# Altium PCB A1_v31.PcbDoc (part 4 of 6)
Units mil, origin at the board's own origin, x right, y up, seen from the top; angles counter-clockwise.
Board outline 3937.01 x 3149.61 mil, 2 copper layers (Top Layer, Bottom Layer); 94 components, 93 nets, 325 pads, 43 vias.
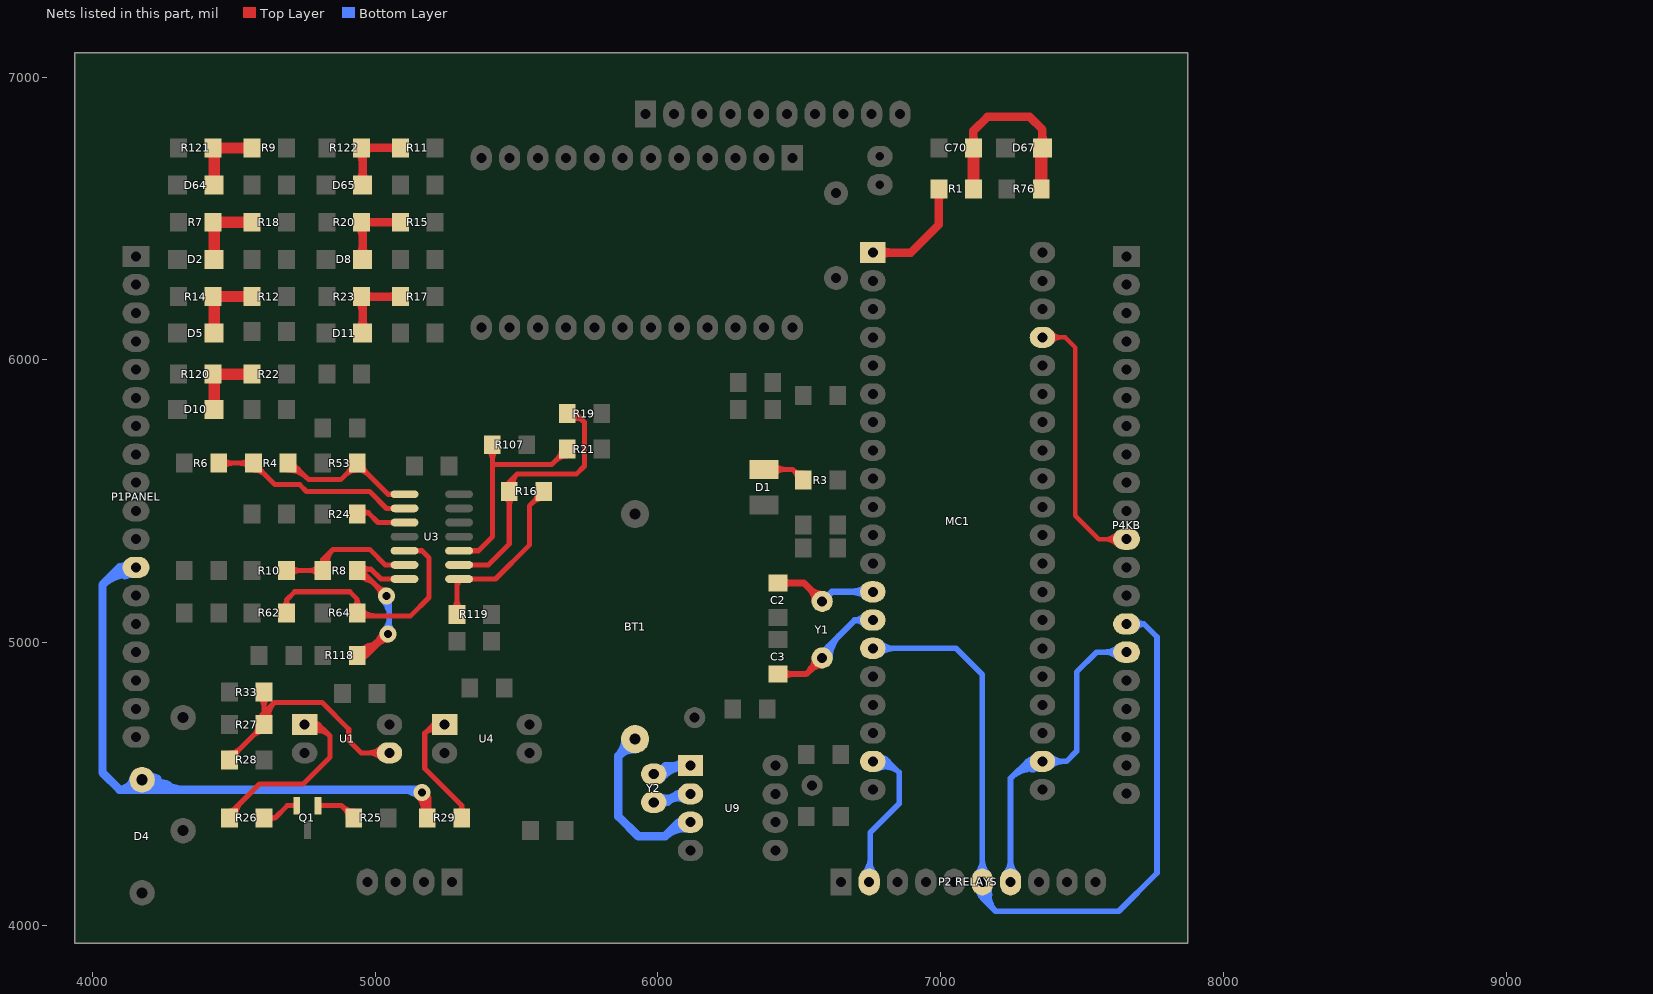
[diagram p4: the nets of this part, all layers, seen from the top]

## Via types
v1: diameter 60, hole 28, Top Layer to Bottom Layer, 30 vias
v2: diameter 90, hole 35.43, Top Layer to Bottom Layer, 6 vias
v3: diameter 75, hole 28, Top Layer to Bottom Layer, 5 vias
v4: diameter 75, hole 35.43, Top Layer to Bottom Layer, 2 vias

## Nets (pads, with @x,y where several pads share a name; then routed paths per layer and width w, separated by ;. In a path a pad name is that pad's centre, name@x,y a point inside that pad or via, vN(x,y) a via of type N, cw(c..) or ccw(c..) an arc to the next point about the centre after c; other vN are vias at no path point) (continued)
MANUAL_R: "P2 RELAYS.6" MC1.15 P4KB.14 | length 4591.4
  Bottom Layer w20: MC1.15@6760,4980 7054,4980 7147.24,4886.76 7147.24,4153.54 7147.24,4097.76 ; P4KB.14@7657.48,5066.14 7718.86,5066.14 ; MC1.15@6786.95,4960.55 cw(c6833.89,4913.61) 6833.89,4980 ; MC1.15@6786.95,4960.55 cw(c6833.89,4913.61) 6833.89,4980 ; MC1.15@6786.95,4960.55 cw(c6833.89,4913.61) 6833.89,4980 ; MC1.15@6786.95,4999.45 ccw(c6833.89,5046.39) 6833.89,4980 ; MC1.15@6786.95,4999.45 ccw(c6833.89,5046.39) 6833.89,4980 ; MC1.15@6786.95,4999.45 ccw(c6833.89,5046.39) 6833.89,4980 ; 7127.8,4182.99 ccw(c7080.85,4229.93) 7147.24,4229.93 ; 7127.8,4182.99 ccw(c7080.85,4229.93) 7147.24,4229.93 ; 7127.8,4182.99 ccw(c7080.85,4229.93) 7147.24,4229.93 ; 7134.33,4119.27 cw(c7122.88,4097.76) 7147.24,4097.76 ; 7134.33,4119.27 cw(c7122.88,4097.76) 7147.24,4097.76 ; 7134.33,4119.27 cw(c7122.88,4097.76) 7147.24,4097.76 ; 7135.28,4147.17 ccw(c7183.24,4132.63) 7147.8,4097.2 ; 7135.28,4147.17 ccw(c7183.24,4132.63) 7147.8,4097.2 ; 7135.28,4147.17 ccw(c7183.24,4132.63) 7147.8,4097.2 ; 7147.24,4097.76 cw(c7171.61,4097.76) 7160.16,4119.27 ; 7147.24,4097.76 cw(c7171.61,4097.76) 7160.16,4119.27 ; 7147.24,4097.76 cw(c7171.61,4097.76) 7160.16,4119.27 ; 7147.24,4097.76 7195,4050 ; 7147.24,4229.93 ccw(c7213.63,4229.93) 7166.69,4182.99 ; 7147.24,4229.93 ccw(c7213.63,4229.93) 7166.69,4182.99 ; 7147.24,4229.93 ccw(c7213.63,4229.93) 7166.69,4182.99 ; 7154.42,4141.37 ccw(c7219.45,4121.65) 7171.4,4073.6 ; 7154.42,4141.37 ccw(c7219.45,4121.65) 7171.4,4073.6 ; 7154.42,4141.37 ccw(c7219.45,4121.65) 7171.4,4073.6 ; 7156.37,4152.09 cw(c7112.2,4110.72) 7172.69,4108.74 ; 7156.37,4152.09 cw(c7112.2,4110.72) 7172.69,4108.74 ; 7156.37,4152.09 cw(c7112.2,4110.72) 7172.69,4108.74 ; 7173.56,4135.56 ccw(c7255.66,4110.67) 7195,4050 ; 7173.56,4135.56 ccw(c7255.66,4110.67) 7195,4050 ; 7173.56,4135.56 ccw(c7255.66,4110.67) 7195,4050 ; 7195,4050 7630,4050 7765,4185 7765,5020 7718.86,5066.14 ; 7718.86,5066.14 cw(c7718.86,5100.38) 7690.36,5081.39 ccw(c7718.86,5100.38) 7718.86,5066.14 ; 7718.86,5066.14 ccw(c7718.86,5031.9) 7690.36,5050.89 cw(c7718.86,5031.9) 7718.86,5066.14
MCONTACT: "P2 RELAYS.7" MC1.22 P4KB.15 | length 3106.8
  Bottom Layer w20: 7247.24,4153.54 7247.24,4520.24 ; P4KB.15@7657.48,4966.14 7551.14,4966.14 7481,4896 7481,4616 7445,4580 MC1.22@7360,4580 7307,4580 ; 7227.8,4182.99 ccw(c7180.85,4229.93) 7247.24,4229.93 ; 7227.8,4182.99 ccw(c7180.85,4229.93) 7247.24,4229.93 ; 7227.8,4182.99 ccw(c7180.85,4229.93) 7247.24,4229.93 ; 7247.24,4229.93 ccw(c7313.63,4229.93) 7266.69,4182.99 ; 7247.24,4229.93 ccw(c7313.63,4229.93) 7266.69,4182.99 ; 7247.24,4229.93 ccw(c7313.63,4229.93) 7266.69,4182.99 ; 7247.25,4520.25 cw(c7329.56,4437.94) MC1.22@7348.12,4552.85 ; 7247.25,4520.25 cw(c7329.56,4437.94) MC1.22@7348.12,4552.85 ; 7247.25,4520.25 cw(c7329.56,4437.94) MC1.22@7348.12,4552.85 ; 7247.24,4520.24 7307,4580 ; 7274.9,4547.9 cw(c7337.25,4485.55) MC1.22@7351.3,4572.6 ; 7274.9,4547.9 cw(c7337.25,4485.55) MC1.22@7351.3,4572.6 ; 7274.9,4547.9 cw(c7337.25,4485.55) MC1.22@7351.3,4572.6 ; 7302.55,4575.55 cw(c7344.94,4533.17) MC1.22@7354.49,4592.34 ; 7302.55,4575.55 cw(c7344.94,4533.17) MC1.22@7354.49,4592.34 ; 7302.55,4575.55 cw(c7344.94,4533.17) MC1.22@7354.49,4592.34 ; 7304.59,4567.83 cw(c7308.81,4526.39) MC1.22@7335.13,4558.68 ; 7304.59,4567.83 cw(c7308.81,4526.39) MC1.22@7335.13,4558.68 ; 7304.59,4567.83 cw(c7308.81,4526.39) MC1.22@7335.13,4558.68 ; 7307,4580 cw(c7307,4556.11) MC1.22@7328.15,4567.22 ; 7307,4580 ccw(c7307,4603.89) MC1.22@7328.15,4592.78 ; 7307,4580 ccw(c7307,4603.89) MC1.22@7328.15,4592.78 ; 7307,4580 cw(c7307,4556.11) MC1.22@7328.15,4567.22 ; 7307,4580 ccw(c7307,4603.89) MC1.22@7328.15,4592.78 ; 7307,4580 cw(c7307,4556.11) MC1.22@7328.15,4567.22 ; 7321.42,4550.13 ccw(c7315.28,4610.33) MC1.22@7362.19,4572.1 ; 7321.42,4550.13 ccw(c7315.28,4610.33) MC1.22@7362.19,4572.1 ; 7321.42,4550.13 ccw(c7315.28,4610.33) MC1.22@7362.19,4572.1 ; MC1.22@7386.95,4560.55 cw(c7433.89,4513.61) 7433.89,4580 ; MC1.22@7386.95,4560.55 cw(c7433.89,4513.61) 7433.89,4580 ; MC1.22@7386.95,4560.55 cw(c7433.89,4513.61) 7433.89,4580 ; MC1.22@7386.95,4599.45 ccw(c7433.89,4646.39) 7433.89,4580 ; MC1.22@7386.95,4599.45 ccw(c7433.89,4646.39) 7433.89,4580 ; MC1.22@7386.95,4599.45 ccw(c7433.89,4646.39) 7433.89,4580 ; 7581.09,4966.14 cw(c7581.09,4899.75) 7628.03,4946.7 ccw(c7581.09,4899.75) 7581.09,4966.14 ; 7581.09,4966.14 ccw(c7581.09,5032.53) 7628.03,4985.59 cw(c7581.09,5032.53) 7581.09,4966.14
MENU: MC1.37 P4KB.11 | length 1415.4
  Top Layer w16: MC1.37@7360,6080 7440,6080 7476,6044 7476,5449 7558.86,5366.14 P4KB.11@7657.48,5366.14 ; MC1.37@7390.98,6062.14 cw(c7427,6034.75) 7427,6080 ; MC1.37@7390.98,6062.14 cw(c7427,6034.75) 7427,6080 ; MC1.37@7390.98,6062.14 cw(c7427,6034.75) 7427,6080 ; MC1.37@7390.98,6097.86 ccw(c7427,6125.25) 7427,6080 ; MC1.37@7390.98,6097.86 ccw(c7427,6125.25) 7427,6080 ; MC1.37@7390.98,6097.86 ccw(c7427,6125.25) 7427,6080 ; 7576.26,5366.14 cw(c7576.26,5294.92) 7626.62,5345.28 ccw(c7576.26,5294.92) 7576.26,5366.14 ; 7576.26,5366.14 ccw(c7576.26,5437.36) 7626.62,5387 cw(c7576.26,5437.36) 7576.26,5366.14
NetBT1_1: BT1.1 U9.3 | length 864
  Bottom Layer w30: BT1.1@5884,4658.42 cw(c5802.06,4657.68) 5860,4599.73 ; BT1.1@5918.69,4623.73 ccw(c5917.95,4541.79) 5860,4599.73 ; BT1.1@5919,4658.73 5860,4599.73 ; 6068.7,4358.7 cw(c6102.7,4324.7) U9.3@6108.39,4372.45 ; U9.3@6104.84,4342.66 ccw(c6093.4,4246.6) 6025,4315 ; U9.3@6115,4365 6075,4365 6025,4315 ; 5860,4599.73 5860,4385 5930,4315 6025,4315
NetC2_2: C2.2 MC1.13 Y1.2 | length 1459.7
  Top Layer w24: C2.2@6425,5211.02 6515.98,5211.02 Y1.2@6581,5146 ; C2.2@6441.33,5198.63 cw(c6471.25,5168.71) 6471.25,5211.02 ; C2.2@6441.33,5198.63 cw(c6471.25,5168.71) 6471.25,5211.02 ; C2.2@6441.33,5198.63 cw(c6471.25,5168.71) 6471.25,5211.02 ; C2.2@6441.33,5223.42 ccw(c6471.25,5253.34) 6471.25,5211.02 ; C2.2@6441.33,5223.42 ccw(c6471.25,5253.34) 6471.25,5211.02 ; C2.2@6441.33,5223.42 ccw(c6471.25,5253.34) 6471.25,5211.02 ; 6537.47,5189.53 cw(c6493.94,5146) Y1.2@6555.5,5146 ; 6537.47,5189.53 ccw(c6581,5233.06) Y1.2@6581,5171.5 ; 6537.47,5189.53 ccw(c6581,5233.06) Y1.2@6581,5171.5 ; 6537.47,5189.53 cw(c6493.94,5146) Y1.2@6555.5,5146 ; 6537.47,5189.53 ccw(c6581,5233.06) Y1.2@6581,5171.5 ; 6537.47,5189.53 cw(c6493.94,5146) Y1.2@6555.5,5146 ; 6546.26,5180.47 ccw(c6590.49,5192.32) Y1.2@6581.3,5147.47 ; 6546.26,5180.47 ccw(c6590.49,5192.32) Y1.2@6581.3,5147.47 ; 6546.26,5180.47 ccw(c6590.49,5192.32) Y1.2@6581.3,5147.47 ; 6546.53,5180.74 cw(c6534.68,5136.51) Y1.2@6579.53,5145.7 ; 6546.53,5180.74 cw(c6534.68,5136.51) Y1.2@6579.53,5145.7 ; 6546.53,5180.74 cw(c6534.68,5136.51) Y1.2@6579.53,5145.7
  Bottom Layer w24: Y1.2@6581,5146 6615,5180 MC1.13@6760,5180 ; 6690.94,5180 cw(c6690.94,5118.44) MC1.13@6734.47,5161.97 ; 6690.94,5180 ccw(c6690.94,5241.56) MC1.13@6734.47,5198.03 ; 6690.94,5180 ccw(c6690.94,5241.56) MC1.13@6734.47,5198.03 ; 6690.94,5180 cw(c6690.94,5118.44) MC1.13@6734.47,5161.97 ; 6690.94,5180 ccw(c6690.94,5241.56) MC1.13@6734.47,5198.03 ; 6690.94,5180 cw(c6690.94,5118.44) MC1.13@6734.47,5161.97
NetC3_2: C3.2 MC1.14 Y1.1 | length 2112
  Top Layer w22: C3.2@6425,4888.98 6523.98,4888.98 Y1.1@6581,4946 ; C3.2@6442.04,4875.88 cw(c6473.67,4844.25) 6473.67,4888.98 ; C3.2@6442.04,4875.88 cw(c6473.67,4844.25) 6473.67,4888.98 ; C3.2@6442.04,4875.88 cw(c6473.67,4844.25) 6473.67,4888.98 ; C3.2@6442.04,4902.08 ccw(c6473.67,4933.71) 6473.67,4888.98 ; C3.2@6442.04,4902.08 ccw(c6473.67,4933.71) 6473.67,4888.98 ; C3.2@6442.04,4902.08 ccw(c6473.67,4933.71) 6473.67,4888.98 ; 6535.76,4900.76 cw(c6581,4855.52) Y1.1@6581,4919.5 ; 6535.76,4900.76 ccw(c6490.52,4946) Y1.1@6554.5,4946 ; 6535.76,4900.76 ccw(c6490.52,4946) Y1.1@6554.5,4946 ; 6535.76,4900.76 cw(c6581,4855.52) Y1.1@6581,4919.5 ; 6535.76,4900.76 ccw(c6490.52,4946) Y1.1@6554.5,4946 ; 6535.76,4900.76 cw(c6581,4855.52) Y1.1@6581,4919.5 ; 6540.58,4908.67 ccw(c6527.65,4956.93) Y1.1@6576.59,4946.9 ; 6540.58,4908.67 ccw(c6527.65,4956.93) Y1.1@6576.59,4946.9 ; 6540.58,4908.67 ccw(c6527.65,4956.93) Y1.1@6576.59,4946.9 ; 6543.67,4905.58 cw(c6591.93,4892.65) Y1.1@6581.9,4941.59 ; 6543.67,4905.58 cw(c6591.93,4892.65) Y1.1@6581.9,4941.59 ; 6543.67,4905.58 cw(c6591.93,4892.65) Y1.1@6581.9,4941.59
  Bottom Layer w22: Y1.1@6581,4946 6581,4965 6696,5080 ; MC1.14@6760,5080 6696,5080 ; Y1.1@6579.2,4950.13 ccw(c6549.17,5019.15) 6621.88,4999.67 ; Y1.1@6579.2,4950.13 ccw(c6549.17,5019.15) 6621.88,4999.67 ; Y1.1@6579.2,4950.13 ccw(c6549.17,5019.15) 6621.88,4999.67 ; Y1.1@6585.5,4946 cw(c6642.23,4946) 6602.12,4986.12 ; Y1.1@6585.5,4946 cw(c6642.23,4946) 6602.12,4986.12 ; Y1.1@6585.5,4946 cw(c6642.23,4946) 6602.12,4986.12 ; Y1.1@6607.5,4946 cw(c6717.35,4946) 6639.67,5023.67 ; Y1.1@6607.5,4946 cw(c6717.35,4946) 6639.67,5023.67 ; Y1.1@6607.5,4946 cw(c6717.35,4946) 6639.67,5023.67 ; 6696,5080 cw(c6696,5033.03) MC1.14@6732.12,5063.06 ; 6696,5080 ccw(c6696,5126.97) MC1.14@6732.12,5096.94 ; 6696,5080 ccw(c6696,5126.97) MC1.14@6732.12,5096.94 ; 6696,5080 cw(c6696,5033.03) MC1.14@6732.12,5063.06 ; 6696,5080 ccw(c6696,5126.97) MC1.14@6732.12,5096.94 ; 6696,5080 cw(c6696,5033.03) MC1.14@6732.12,5063.06
NetC70_1: C70.1 D67.1 R1.2 R76.2 | length 1172.8
  Top Layer w30: C70.1@7116.02,6750 7116.02,6811.02 7165,6860 7315,6860 7359.96,6815.04 D67.1@7359.96,6750 ; C70.1@7105.75,6764.21 ccw(c7080.95,6789.01) 7116.02,6789.01 ; C70.1@7105.75,6764.21 ccw(c7080.95,6789.01) 7116.02,6789.01 ; C70.1@7105.75,6764.21 ccw(c7080.95,6789.01) 7116.02,6789.01 ; 7116.02,6789.01 ccw(c7151.1,6789.01) C70.1@7126.3,6764.21 ; 7116.02,6789.01 ccw(c7151.1,6789.01) C70.1@7126.3,6764.21 ; 7116.02,6789.01 ccw(c7151.1,6789.01) C70.1@7126.3,6764.21 ; D67.1@7346.91,6763.06 ccw(c7315.38,6794.58) 7359.96,6794.58 ; D67.1@7346.91,6763.06 ccw(c7315.38,6794.58) 7359.96,6794.58 ; D67.1@7346.91,6763.06 ccw(c7315.38,6794.58) 7359.96,6794.58 ; 7359.96,6794.58 ccw(c7404.54,6794.58) D67.1@7373.02,6763.06 ; 7359.96,6794.58 ccw(c7404.54,6794.58) D67.1@7373.02,6763.06 ; 7359.96,6794.58 ccw(c7404.54,6794.58) D67.1@7373.02,6763.06
  Top Layer w44: R1.2@7116.02,6605 C70.1@7116.02,6750 ; R76.2@7356.02,6605 7356.02,6746.06 D67.1@7359.96,6750 ; 7356.02,6712.82 cw(c7397.15,6712.82) D67.1@7368.07,6741.89 ; 7356.02,6712.82 cw(c7397.15,6712.82) D67.1@7368.07,6741.89 ; 7356.02,6712.82 cw(c7397.15,6712.82) D67.1@7368.07,6741.89
NetD1_2: D1.2 R3.1 | length 647.9
  Top Layer w18: D1.2@6375,5612.99 6475.98,5612.99 ; R3.1@6513.98,5575 6475.98,5612.99 ; D1.2@6410.02,5595.69 cw(c6451.78,5553.93) 6451.78,5612.99 ; D1.2@6410.02,5595.69 cw(c6451.78,5553.93) 6451.78,5612.99 ; D1.2@6410.02,5595.69 cw(c6451.78,5553.93) 6451.78,5612.99 ; D1.2@6410.02,5630.29 ccw(c6451.78,5672.05) 6451.78,5612.99 ; D1.2@6410.02,5630.29 ccw(c6451.78,5672.05) 6451.78,5612.99 ; D1.2@6410.02,5630.29 ccw(c6451.78,5672.05) 6451.78,5612.99 ; 6475.99,5612.99 ccw(c6509.07,5646.08) R3.1@6512.48,5599.41 ; 6475.99,5612.99 ccw(c6509.07,5646.08) R3.1@6512.48,5599.41 ; 6475.99,5612.99 ccw(c6509.07,5646.08) R3.1@6512.48,5599.41 ; 6481.72,5607.26 cw(c6453.4,5578.94) R3.1@6493.45,5578.94 ; 6481.72,5607.26 cw(c6453.4,5578.94) R3.1@6493.45,5578.94 ; 6481.72,5607.26 cw(c6453.4,5578.94) R3.1@6493.45,5578.94
NetD2_1: D2.1 R7.2 R18.1 | length 356.8
  Top Layer w40: D2.1@4429.96,6355.82 4429.96,6483.28 R7.2@4426.02,6487.21 R18.1@4563.98,6487.21 ; R7.2@4419.29,6476.54 cw(c4393.52,6450.77) 4429.96,6450.77 ; R7.2@4419.29,6476.54 cw(c4393.52,6450.77) 4429.96,6450.77 ; R7.2@4419.29,6476.54 cw(c4393.52,6450.77) 4429.96,6450.77
NetD5_1: D5.1 R12.1 R14.2 | length 354.9
  Top Layer w40: D5.1@4429.96,6095 4429.96,6220.49 R14.2@4426.02,6224.43 R12.1@4563.98,6224.43 ; R14.2@4419.29,6213.75 cw(c4393.52,6187.99) 4429.96,6187.99 ; R14.2@4419.29,6213.75 cw(c4393.52,6187.99) 4429.96,6187.99 ; R14.2@4419.29,6213.75 cw(c4393.52,6187.99) 4429.96,6187.99
NetD8_1: D8.1 R15.1 R20.2 | length 925.9
  Top Layer w30: D8.1@4954.96,6355.82 4954.96,6483.28 R20.2@4951.02,6487.21 R15.1@5088.98,6487.21 ; R20.2@4940.75,6473 cw(c4906.45,6438.7) 4954.96,6438.7 ; R20.2@4940.75,6473 cw(c4906.45,6438.7) 4954.96,6438.7 ; R20.2@4940.75,6473 cw(c4906.45,6438.7) 4954.96,6438.7 ; D8.1@4941.9,6368.87 ccw(c4910.38,6400.4) 4954.96,6400.4 ; D8.1@4941.9,6368.87 ccw(c4910.38,6400.4) 4954.96,6400.4 ; D8.1@4941.9,6368.87 ccw(c4910.38,6400.4) 4954.96,6400.4 ; 4954.96,6400.4 ccw(c4999.54,6400.4) D8.1@4968.02,6368.87 ; 4954.96,6400.4 ccw(c4999.54,6400.4) D8.1@4968.02,6368.87 ; 4954.96,6400.4 ccw(c4999.54,6400.4) D8.1@4968.02,6368.87 ; R20.2@4961.3,6476.94 cw(c4986.1,6452.14) 4986.1,6487.21 ; R20.2@4961.3,6476.94 cw(c4986.1,6452.14) 4986.1,6487.21 ; R20.2@4961.3,6476.94 cw(c4986.1,6452.14) 4986.1,6487.21 ; R20.2@4961.3,6497.48 ccw(c4986.1,6522.28) 4986.1,6487.21 ; R20.2@4961.3,6497.48 ccw(c4986.1,6522.28) 4986.1,6487.21 ; R20.2@4961.3,6497.48 ccw(c4986.1,6522.28) 4986.1,6487.21 ; 5053.9,6487.21 cw(c5053.9,6452.14) R15.1@5078.7,6476.94 ; 5053.9,6487.21 ccw(c5053.9,6522.28) R15.1@5078.7,6497.48 ; 5053.9,6487.21 ccw(c5053.9,6522.28) R15.1@5078.7,6497.48 ; 5053.9,6487.21 cw(c5053.9,6452.14) R15.1@5078.7,6476.94 ; 5053.9,6487.21 ccw(c5053.9,6522.28) R15.1@5078.7,6497.48 ; 5053.9,6487.21 cw(c5053.9,6452.14) R15.1@5078.7,6476.94
NetD10_1: D10.1 R22.1 R120.1 | length 350.4
  Top Layer w40: D10.1@4429.96,5825 4429.96,5946.06 R120.1@4426.02,5950 R22.1@4563.98,5950 ; R120.1@4419.29,5939.33 cw(c4393.52,5913.56) 4429.96,5913.56 ; R120.1@4419.29,5939.33 cw(c4393.52,5913.56) 4429.96,5913.56 ; R120.1@4419.29,5939.33 cw(c4393.52,5913.56) 4429.96,5913.56
NetD11_1: D11.1 R17.1 R23.2 | length 923.9
  Top Layer w30: D11.1@4954.96,6095 4954.96,6220.49 R23.2@4951.02,6224.43 R17.1@5088.98,6224.43 ; R23.2@4940.75,6210.22 cw(c4906.45,6175.91) 4954.96,6175.91 ; R23.2@4940.75,6210.22 cw(c4906.45,6175.91) 4954.96,6175.91 ; R23.2@4940.75,6210.22 cw(c4906.45,6175.91) 4954.96,6175.91 ; D11.1@4941.9,6108.06 ccw(c4910.38,6139.58) 4954.96,6139.58 ; D11.1@4941.9,6108.06 ccw(c4910.38,6139.58) 4954.96,6139.58 ; D11.1@4941.9,6108.06 ccw(c4910.38,6139.58) 4954.96,6139.58 ; 4954.96,6139.58 ccw(c4999.54,6139.58) D11.1@4968.02,6108.06 ; 4954.96,6139.58 ccw(c4999.54,6139.58) D11.1@4968.02,6108.06 ; 4954.96,6139.58 ccw(c4999.54,6139.58) D11.1@4968.02,6108.06 ; R23.2@4961.3,6214.15 cw(c4986.1,6189.35) 4986.1,6224.43 ; R23.2@4961.3,6214.15 cw(c4986.1,6189.35) 4986.1,6224.43 ; R23.2@4961.3,6214.15 cw(c4986.1,6189.35) 4986.1,6224.43 ; R23.2@4961.3,6234.7 ccw(c4986.1,6259.5) 4986.1,6224.43 ; R23.2@4961.3,6234.7 ccw(c4986.1,6259.5) 4986.1,6224.43 ; R23.2@4961.3,6234.7 ccw(c4986.1,6259.5) 4986.1,6224.43 ; 5053.9,6224.43 cw(c5053.9,6189.35) R17.1@5078.7,6214.15 ; 5053.9,6224.43 ccw(c5053.9,6259.5) R17.1@5078.7,6234.7 ; 5053.9,6224.43 ccw(c5053.9,6259.5) R17.1@5078.7,6234.7 ; 5053.9,6224.43 cw(c5053.9,6189.35) R17.1@5078.7,6214.15 ; 5053.9,6224.43 ccw(c5053.9,6259.5) R17.1@5078.7,6234.7 ; 5053.9,6224.43 cw(c5053.9,6189.35) R17.1@5078.7,6214.15
NetD64_1: D64.1 R9.1 R121.1 | length 356.8
  Top Layer w40: D64.1@4429.96,6618.61 4429.96,6746.06 R121.1@4426.02,6750 R9.1@4563.98,6750 ; R121.1@4419.29,6739.33 cw(c4393.52,6713.56) 4429.96,6713.56 ; R121.1@4419.29,6739.33 cw(c4393.52,6713.56) 4429.96,6713.56 ; R121.1@4419.29,6739.33 cw(c4393.52,6713.56) 4429.96,6713.56
NetD65_1: D65.1 R11.1 R122.1 | length 925.9
  Top Layer w30: D65.1@4954.96,6618.61 4954.96,6746.06 R122.1@4951.02,6750 R11.1@5088.98,6750 ; R122.1@4940.75,6735.79 cw(c4906.45,6701.49) 4954.96,6701.49 ; R122.1@4940.75,6735.79 cw(c4906.45,6701.49) 4954.96,6701.49 ; R122.1@4940.75,6735.79 cw(c4906.45,6701.49) 4954.96,6701.49 ; D65.1@4941.9,6631.66 ccw(c4910.38,6663.18) 4954.96,6663.18 ; D65.1@4941.9,6631.66 ccw(c4910.38,6663.18) 4954.96,6663.18 ; D65.1@4941.9,6631.66 ccw(c4910.38,6663.18) 4954.96,6663.18 ; 4954.96,6663.18 ccw(c4999.54,6663.18) D65.1@4968.02,6631.66 ; 4954.96,6663.18 ccw(c4999.54,6663.18) D65.1@4968.02,6631.66 ; 4954.96,6663.18 ccw(c4999.54,6663.18) D65.1@4968.02,6631.66 ; R122.1@4961.3,6739.73 cw(c4986.1,6714.93) 4986.1,6750 ; R122.1@4961.3,6739.73 cw(c4986.1,6714.93) 4986.1,6750 ; R122.1@4961.3,6739.73 cw(c4986.1,6714.93) 4986.1,6750 ; R122.1@4961.3,6760.27 ccw(c4986.1,6785.07) 4986.1,6750 ; R122.1@4961.3,6760.27 ccw(c4986.1,6785.07) 4986.1,6750 ; R122.1@4961.3,6760.27 ccw(c4986.1,6785.07) 4986.1,6750 ; 5053.9,6750 cw(c5053.9,6714.93) R11.1@5078.7,6739.73 ; 5053.9,6750 ccw(c5053.9,6785.07) R11.1@5078.7,6760.27 ; 5053.9,6750 ccw(c5053.9,6785.07) R11.1@5078.7,6760.27 ; 5053.9,6750 cw(c5053.9,6714.93) R11.1@5078.7,6739.73 ; 5053.9,6750 ccw(c5053.9,6785.07) R11.1@5078.7,6760.27 ; 5053.9,6750 cw(c5053.9,6714.93) R11.1@5078.7,6739.73
NetMC1_1: MC1.1 R1.1 | length 822.2
  Top Layer w30: MC1.1@6760,6380 6895,6380 6993.98,6478.98 R1.1@6993.98,6605 ; MC1.1@6783.41,6364.09 cw(c6821.82,6325.68) 6821.82,6380 ; MC1.1@6783.41,6364.09 cw(c6821.82,6325.68) 6821.82,6380 ; MC1.1@6783.41,6364.09 cw(c6821.82,6325.68) 6821.82,6380 ; MC1.1@6783.41,6395.91 ccw(c6821.82,6434.32) 6821.82,6380 ; MC1.1@6783.41,6395.91 ccw(c6821.82,6434.32) 6821.82,6380 ; MC1.1@6783.41,6395.91 ccw(c6821.82,6434.32) 6821.82,6380 ; R1.1@6983.7,6590.79 cw(c6958.9,6565.99) 6993.98,6565.99 ; R1.1@6983.7,6590.79 cw(c6958.9,6565.99) 6993.98,6565.99 ; R1.1@6983.7,6590.79 cw(c6958.9,6565.99) 6993.98,6565.99 ; 6993.98,6565.99 cw(c7029.05,6565.99) R1.1@7004.25,6590.79 ; 6993.98,6565.99 cw(c7029.05,6565.99) R1.1@7004.25,6590.79 ; 6993.98,6565.99 cw(c7029.05,6565.99) R1.1@7004.25,6590.79
NetQ1_1: Q1.1 R25.2 | length 511
  Top Layer w18: Q1.1@4797.4,4423.31 4880.67,4423.31 R25.2@4923.98,4380 ; 4882.21,4421.76 ccw(c4923.98,4463.53) R25.2@4923.98,4404.46 ; 4882.21,4421.76 ccw(c4923.98,4463.53) R25.2@4923.98,4404.46 ; 4882.21,4421.76 ccw(c4923.98,4463.53) R25.2@4923.98,4404.46 ; 4891.53,4413.16 cw(c4880.53,4372.11) R25.2@4921.54,4383.27 ; 4891.53,4413.16 cw(c4880.53,4372.11) R25.2@4921.54,4383.27 ; 4891.53,4413.16 cw(c4880.53,4372.11) R25.2@4921.54,4383.27 ; 4891.72,4412.26 cw(c4863.4,4383.94) R25.2@4903.45,4383.94 ; 4891.72,4412.26 cw(c4863.4,4383.94) R25.2@4903.45,4383.94 ; 4891.72,4412.26 cw(c4863.4,4383.94) R25.2@4903.45,4383.94
NetQ1_2: Q1.2 R26.1 | length 290
  Top Layer w18: R26.1@4606.02,4380 4645,4380 ; Q1.2@4722.6,4423.31 4688.31,4423.31 4645,4380 ; R26.1@4622.95,4368.39 cw(c4645,4353.26) 4645,4380 ; R26.1@4622.95,4368.39 cw(c4645,4353.26) 4645,4380 ; R26.1@4622.95,4368.39 cw(c4645,4353.26) 4645,4380 ; R26.1@4622.95,4391.61 ccw(c4645,4406.74) 4645,4380 ; R26.1@4622.95,4391.61 ccw(c4645,4406.74) 4645,4380 ; R26.1@4622.95,4391.61 ccw(c4645,4406.74) 4645,4380
NetR4_1: R4.1 R53.2 U3.1 | length 1222.6
  Top Layer w18: R4.1@4691.02,5610.54 cw(c4691.02,5515.32) 4758.35,5582.65 ; R4.1@4691.02,5628.54 cw(c4691.02,5576.77) 4727.63,5613.37 ; R4.1@4691.02,5635 4706,5635 4764.46,5576.54 4877.56,5576.54 R53.2@4936.02,5635 4936.02,5633.98 5045,5525 U3.1@5103.54,5525 ; 4894.26,5593.24 cw(c4936.02,5551.47) R53.2@4936.02,5610.54 ; 4894.26,5593.24 cw(c4936.02,5551.47) R53.2@4936.02,5610.54 ; 4894.26,5593.24 cw(c4936.02,5551.47) R53.2@4936.02,5610.54 ; 4903.58,5601.84 ccw(c4892.58,5642.89) R53.2@4933.59,5631.73 ; 4903.58,5601.84 ccw(c4892.58,5642.89) R53.2@4933.59,5631.73 ; 4903.58,5601.84 ccw(c4892.58,5642.89) R53.2@4933.59,5631.73 ; 4903.77,5602.74 ccw(c4875.44,5631.06) R53.2@4915.5,5631.06 ; 4903.77,5602.74 ccw(c4875.44,5631.06) R53.2@4915.5,5631.06 ; 4903.77,5602.74 ccw(c4875.44,5631.06) R53.2@4915.5,5631.06 ; R53.2@4936.02,5610.54 cw(c4936.02,5553.95) 4976.04,5593.96 ; R53.2@4936.02,5610.54 cw(c4936.02,5553.95) 4976.04,5593.96 ; R53.2@4936.02,5610.54 cw(c4936.02,5553.95) 4976.04,5593.96 ; R53.2@4956.55,5631.06 ccw(c4999.08,5631.06) 4969.01,5600.99 ; R53.2@4956.55,5631.06 ccw(c4999.08,5631.06) 4969.01,5600.99 ; R53.2@4956.55,5631.06 ccw(c4999.08,5631.06) 4969.01,5600.99
NetR4_2: R4.2 R6.1 U3.2 | length 1557.4
  Top Layer w18: R6.1@4446.02,5635 R4.2@4568.98,5635 4644.98,5559 4733.08,5559 4757.08,5535 4980,5535 5040,5475 U3.2@5103.54,5475 ; R6.1@4460.54,5620.48 cw(c4495.58,5585.44) 4495.58,5635 ; R6.1@4460.54,5620.48 cw(c4495.58,5585.44) 4495.58,5635 ; R6.1@4460.54,5620.48 cw(c4495.58,5585.44) 4495.58,5635 ; R6.1@4460.54,5649.52 ccw(c4495.58,5684.56) 4495.58,5635 ; R6.1@4460.54,5649.52 ccw(c4495.58,5684.56) 4495.58,5635 ; R6.1@4460.54,5649.52 ccw(c4495.58,5684.56) 4495.58,5635 ; 4519.42,5635 cw(c4519.42,5585.44) R4.2@4554.46,5620.48 ; 4519.42,5635 ccw(c4519.42,5684.56) R4.2@4554.46,5649.52 ; 4519.42,5635 ccw(c4519.42,5684.56) R4.2@4554.46,5649.52 ; 4519.42,5635 cw(c4519.42,5585.44) R4.2@4554.46,5620.48 ; 4519.42,5635 ccw(c4519.42,5684.56) R4.2@4554.46,5649.52 ; 4519.42,5635 cw(c4519.42,5585.44) R4.2@4554.46,5620.48 ; R4.2@4568.98,5610.54 cw(c4568.98,5551.47) 4610.74,5593.24 ; R4.2@4568.98,5610.54 cw(c4568.98,5551.47) 4610.74,5593.24 ; R4.2@4568.98,5610.54 cw(c4568.98,5551.47) 4610.74,5593.24 ; R4.2@4571.41,5631.73 ccw(c4612.42,5642.89) 4601.42,5601.84 ; R4.2@4571.41,5631.73 ccw(c4612.42,5642.89) 4601.42,5601.84 ; R4.2@4571.41,5631.73 ccw(c4612.42,5642.89) 4601.42,5601.84 ; R4.2@4589.5,5631.06 ccw(c4629.56,5631.06) 4601.23,5602.74 ; R4.2@4589.5,5631.06 ccw(c4629.56,5631.06) 4601.23,5602.74 ; R4.2@4589.5,5631.06 ccw(c4629.56,5631.06) 4601.23,5602.74
NetR8_1: R8.1 R10.2 U3.6 | length 1457.1
  Top Layer w18: R10.2@4686.02,5255 R8.1@4813.98,5255 4813.98,5293.98 4850,5330 ; U3.6@5103.54,5275 5035,5275 4980,5330 4850,5330 ; R10.2@4700.54,5240.48 cw(c4735.58,5205.44) 4735.58,5255 ; R10.2@4700.54,5240.48 cw(c4735.58,5205.44) 4735.58,5255 ; R10.2@4700.54,5240.48 cw(c4735.58,5205.44) 4735.58,5255 ; R10.2@4700.54,5269.52 ccw(c4735.58,5304.56) 4735.58,5255 ; R10.2@4700.54,5269.52 ccw(c4735.58,5304.56) 4735.58,5255 ; R10.2@4700.54,5269.52 ccw(c4735.58,5304.56) 4735.58,5255 ; 4764.42,5255 cw(c4764.42,5205.44) R8.1@4799.46,5240.48 ; 4764.42,5255 ccw(c4764.42,5304.56) R8.1@4799.46,5269.52 ; 4764.42,5255 ccw(c4764.42,5304.56) R8.1@4799.46,5269.52 ; 4764.42,5255 cw(c4764.42,5205.44) R8.1@4799.46,5240.48 ; 4764.42,5255 ccw(c4764.42,5304.56) R8.1@4799.46,5269.52 ; 4764.42,5255 cw(c4764.42,5205.44) R8.1@4799.46,5240.48 ; R8.1@4803.94,5276.84 ccw(c4794.34,5293.97) 4813.98,5293.97 ; R8.1@4803.94,5276.84 ccw(c4794.34,5293.97) 4813.98,5293.97 ; R8.1@4803.94,5276.84 ccw(c4794.34,5293.97) 4813.98,5293.97 ; 4813.98,5293.97 ccw(c4833.61,5293.97) R8.1@4824.01,5276.84 ; 4813.98,5293.97 ccw(c4833.61,5293.97) R8.1@4824.01,5276.84 ; 4813.98,5293.97 ccw(c4833.61,5293.97) R8.1@4824.01,5276.84 ; R8.1@4816.4,5259.67 cw(c4863.56,5273.89) 4828.73,5308.73 ; R8.1@4816.4,5259.67 cw(c4863.56,5273.89) 4828.73,5308.73 ; R8.1@4816.4,5259.67 cw(c4863.56,5273.89) 4828.73,5308.73 ; R8.1@4833.63,5264.86 cw(c4896.24,5283.75) 4850,5330 ; R8.1@4833.63,5264.86 cw(c4896.24,5283.75) 4850,5330 ; R8.1@4833.63,5264.86 cw(c4896.24,5283.75) 4850,5330
NetR8_2: R8.2 R118.1 U3.7 | length 4689.4
  Top Layer w18: R118.1@4936.02,4955 4970,4955 ; v1(5040,5165) 4950,5255 R8.2@4936.02,5255 4941.02,5260 4985,5260 ; v1(5045,5030) 4970,4955 ; U3.7@5103.54,5225 5020,5225 4985,5260 ; R118.1@4936.02,4943.46 ccw(c4936.02,4997.64) 4974.33,4959.33 ; R118.1@4936.02,4943.46 ccw(c4936.02,4997.64) 4974.33,4959.33 ; R118.1@4936.02,4943.46 ccw(c4936.02,4997.64) 4974.33,4959.33 ; R118.1@4936.02,4961.46 ccw(c4936.02,5059.1) 5005.06,4990.06 ; R118.1@4936.02,4961.46 ccw(c4936.02,5059.1) 5005.06,4990.06 ; R118.1@4936.02,4961.46 ccw(c4936.02,5059.1) 5005.06,4990.06 ; R118.1@4936.02,4979.46 ccw(c4936.02,5120.55) v1@5035.79,5020.79 ; R118.1@4936.02,4979.46 ccw(c4936.02,5120.55) v1@5035.79,5020.79 ; R118.1@4936.02,4979.46 ccw(c4936.02,5120.55) v1@5035.79,5020.79 ; R8.2@4936.02,5230.54 cw(c4936.02,5137.73) 5001.65,5203.35 ; R8.2@4936.02,5230.54 cw(c4936.02,5137.73) 5001.65,5203.35 ; R8.2@4936.02,5230.54 cw(c4936.02,5137.73) 5001.65,5203.35 ; R8.2@4936.02,5248.54 cw(c4936.02,5199.19) 4970.92,5234.08 ; R8.2@4936.02,5248.54 cw(c4936.02,5199.19) 4970.92,5234.08 ; R8.2@4936.02,5248.54 cw(c4936.02,5199.19) 4970.92,5234.08 ; R118.1@4938.21,4957.67 cw(c5002.12,4920.77) 4983.02,4992.06 ; R118.1@4938.21,4957.67 cw(c5002.12,4920.77) 4983.02,4992.06 ; R118.1@4938.21,4957.67 cw(c5002.12,4920.77) 4983.02,4992.06 ; R8.2@4938.3,5252.15 ccw(c4993.71,5278.67) 4977.81,5219.34 ; R8.2@4938.3,5252.15 ccw(c4993.71,5278.67) 4977.81,5219.34 ; R8.2@4938.3,5252.15 ccw(c4993.71,5278.67) 4977.81,5219.34 ; R118.1@4946.29,4976.71 ccw(c4966.9,5012.41) 4977.57,4972.6 ; R118.1@4946.29,4976.71 ccw(c4966.9,5012.41) 4977.57,4972.6 ; R118.1@4946.29,4976.71 ccw(c4966.9,5012.41) 4977.57,4972.6 ; R8.2@4950.54,5273.45 ccw(c4983.02,5305.93) 4983.02,5260 ; R8.2@4950.54,5273.45 ccw(c4983.02,5305.93) 4983.02,5260 ; R8.2@4950.54,5273.45 ccw(c4983.02,5305.93) 4983.02,5260 ; R8.2@4951.18,5245.09 cw(c4985,5214.19) 4985,5260 ; R8.2@4951.18,5245.09 cw(c4985,5214.19) 4985,5260 ; R8.2@4951.18,5245.09 cw(c4985,5214.19) 4985,5260 ; R118.1@4953.81,4948.68 cw(c5003.88,4919.8) 4988.92,4975.64 ; R118.1@4953.81,4948.68 cw(c5003.88,4919.8) 4988.92,4975.64 ; R118.1@4953.81,4948.68 cw(c5003.88,4919.8) 4988.92,4975.64 ; R118.1@4954.2,4945.45 cw(c4970,4937.15) 4970,4955 ; R118.1@4954.2,4945.45 cw(c4970,4937.15) 4970,4955 ; R118.1@4954.2,4945.45 cw(c4970,4937.15) 4970,4955 ; R118.1@4954.2,4964.55 ccw(c4970,4972.85) 4970,4955 ; R118.1@4954.2,4964.55 ccw(c4970,4972.85) 4970,4955 ; R118.1@4954.2,4964.55 ccw(c4970,4972.85) 4970,4955 ; 4995.73,4997.66 ccw(c4964.63,5051.54) v1@5024.72,5035.44 ; 4995.73,4997.66 ccw(c4964.63,5051.54) v1@5024.72,5035.44 ; 4995.73,4997.66 ccw(c4964.63,5051.54) v1@5024.72,5035.44 ; 4995.73,4997.66 ccw(c4964.63,5051.54) v1@5024.72,5035.44 ; 4995.73,4997.66 ccw(c4964.63,5051.54) v1@5024.72,5035.44 ; 4995.73,4997.66 ccw(c4964.63,5051.54) v1@5024.72,5035.44 ; 5004.15,5200.85 cw(c4968.3,5165) v1@5019,5165 ; 5004.15,5200.85 ccw(c5040,5236.7) v1@5040,5186 ; 5004.15,5200.85 ccw(c5040,5236.7) v1@5040,5186 ; 5004.15,5200.85 cw(c4968.3,5165) v1@5019,5165 ; 5004.15,5200.85 ccw(c5040,5236.7) v1@5040,5186 ; 5004.15,5200.85 cw(c4968.3,5165) v1@5019,5165 ; 5008.85,5194.35 cw(c4998.73,5156.55) v1@5037.06,5164.4 ; 5008.85,5194.35 cw(c4998.73,5156.55) v1@5037.06,5164.4 ; 5008.85,5194.35 cw(c4998.73,5156.55) v1@5037.06,5164.4 ; 5009.15,4994.15 cw(c5045,4958.3) v1@5045,5009 ; 5009.15,4994.15 ccw(c4973.3,5030) v1@5024,5030 ; 5009.15,4994.15 ccw(c4973.3,5030) v1@5024,5030 ; 5009.15,4994.15 cw(c5045,4958.3) v1@5045,5009 ; 5009.15,4994.15 ccw(c4973.3,5030) v1@5024,5030 ; 5009.15,4994.15 cw(c5045,4958.3) v1@5045,5009 ; 5009.83,5005.8 cw(c5029.42,4971.86) v1@5039.56,5009.72 ; 5009.83,5005.8 cw(c5029.42,4971.86) v1@5039.56,5009.72 ; 5009.83,5005.8 cw(c5029.42,4971.86) v1@5039.56,5009.72 ; 5009.83,5005.8 cw(c5029.42,4971.86) v1@5039.56,5009.72 ; 5009.83,5005.8 cw(c5029.42,4971.86) v1@5039.56,5009.72 ; 5009.83,5005.8 cw(c5029.42,4971.86) v1@5039.56,5009.72 ; 5010.65,5196.15 ccw(c5048.45,5206.27) v1@5040.6,5167.94 ; 5010.65,5196.15 ccw(c5048.45,5206.27) v1@5040.6,5167.94 ; 5010.65,5196.15 ccw(c5048.45,5206.27) v1@5040.6,5167.94 ; 5013.52,5016.04 cw(c5035.41,5003.4) v1@5043.98,5027.18 ; 5013.52,5016.04 cw(c5035.41,5003.4) v1@5043.98,5027.18 ; 5013.52,5016.04 cw(c5035.41,5003.4) v1@5043.98,5027.18 ; 5013.52,5016.04 cw(c5035.41,5003.4) v1@5043.98,5027.18 ; 5013.85,5000.65 ccw(c5003.73,5038.45) v1@5042.06,5030.6 ; 5013.85,5000.65 ccw(c5003.73,5038.45) v1@5042.06,5030.6 ; 5013.85,5000.65 ccw(c5003.73,5038.45) v1@5042.06,5030.6 ; 5015.65,4998.85 cw(c5053.45,4988.73) v1@5045.6,5027.06 ; 5015.65,4998.85 cw(c5053.45,4988.73) v1@5045.6,5027.06 ; 5015.65,4998.85 cw(c5053.45,4988.73) v1@5045.6,5027.06
  Bottom Layer w18: v1(5040,5165) 5050,5155 5050,5035 v1(5045,5030) ; v1@5025.15,5150.15 cw(c4965.16,5090.16) 5050,5090.16 ; v1@5025.15,5150.15 cw(c4965.16,5090.16) 5050,5090.16 ; v1@5025.15,5150.15 cw(c4965.16,5090.16) 5050,5090.16 ; v1@5030.15,5044.85 ccw(c4982.23,5092.77) 5050,5092.77 ; v1@5030.15,5044.85 ccw(c4982.23,5092.77) 5050,5092.77 ; v1@5030.15,5044.85 ccw(c4982.23,5092.77) 5050,5092.77 ; v1@5037.88,5162.88 cw(c5008.62,5133.62) 5050,5133.62 ; v1@5037.88,5162.88 cw(c5008.62,5133.62) 5050,5133.62 ; v1@5037.88,5162.88 cw(c5008.62,5133.62) 5050,5133.62 ; 5050,5068.63 ccw(c5083.63,5068.63) v1@5059.85,5044.85 ; 5050,5068.63 ccw(c5083.63,5068.63) v1@5059.85,5044.85 ; 5050,5068.63 ccw(c5083.63,5068.63) v1@5059.85,5044.85
NetR16_1: R16.1 R19.2 U3.9 | length 1941.2
  Top Layer w18: U3.9@5296.46,5275 5400,5275 5473.98,5348.98 R16.1@5473.98,5535 5473.98,5568.98 ; R19.2@5678.98,5810 5710,5810 ; R16.1@5459.46,5516.55 cw(c5424.42,5481.51) 5473.98,5481.51 ; R16.1@5459.46,5516.55 cw(c5424.42,5481.51) 5473.98,5481.51 ; R16.1@5459.46,5516.55 cw(c5424.42,5481.51) 5473.98,5481.51 ; R16.1@5466.52,5558.06 ccw(c5462.26,5568.98) 5473.98,5568.98 ; R16.1@5466.52,5558.06 ccw(c5462.26,5568.98) 5473.98,5568.98 ; R16.1@5466.52,5558.06 ccw(c5462.26,5568.98) 5473.98,5568.98 ; 5473.98,5481.51 cw(c5523.53,5481.51) R16.1@5488.49,5516.55 ; 5473.98,5481.51 cw(c5523.53,5481.51) R16.1@5488.49,5516.55 ; 5473.98,5481.51 cw(c5523.53,5481.51) R16.1@5488.49,5516.55 ; 5473.98,5568.98 ccw(c5485.69,5568.98) R16.1@5481.43,5558.06 ; 5473.98,5568.98 ccw(c5485.69,5568.98) R16.1@5481.43,5558.06 ; 5473.98,5568.98 ccw(c5485.69,5568.98) R16.1@5481.43,5558.06 ; 5473.98,5568.98 5501,5596 ; R16.1@5476.26,5540.01 cw(c5506.52,5554.24) 5482.88,5577.88 ; R16.1@5476.26,5540.01 cw(c5506.52,5554.24) 5482.88,5577.88 ; R16.1@5476.26,5540.01 cw(c5506.52,5554.24) 5482.88,5577.88 ; R16.1@5492.55,5547.67 cw(c5531.17,5565.82) 5501,5596 ; R16.1@5492.55,5547.67 cw(c5531.17,5565.82) 5501,5596 ; R16.1@5492.55,5547.67 cw(c5531.17,5565.82) 5501,5596 ; 5501,5596 5711,5596 5740,5625 5740,5780 ; R19.2@5680.15,5803.82 cw(c5696.99,5771.63) 5722.68,5797.32 ; R19.2@5680.15,5803.82 cw(c5696.99,5771.63) 5722.68,5797.32 ; R19.2@5680.15,5803.82 cw(c5696.99,5771.63) 5722.68,5797.32 ; R19.2@5688.49,5787.87 cw(c5708.89,5748.89) 5740,5780 ; R19.2@5688.49,5787.87 cw(c5708.89,5748.89) 5740,5780 ; R19.2@5688.49,5787.87 cw(c5708.89,5748.89) 5740,5780 ; R19.2@5697.87,5801.97 cw(c5710,5796.82) 5710,5810 ; R19.2@5697.87,5801.97 cw(c5710,5796.82) 5710,5810 ; R19.2@5697.87,5801.97 cw(c5710,5796.82) 5710,5810 ; R19.2@5697.87,5818.03 ccw(c5710,5823.18) 5710,5810 ; R19.2@5697.87,5818.03 ccw(c5710,5823.18) 5710,5810 ; R19.2@5697.87,5818.03 ccw(c5710,5823.18) 5710,5810 ; 5710,5810 5740,5780
NetR16_2: R16.2 R119.1 U3.8 | length 1373.7
  Top Layer w18: R119.1@5288.98,5100 5288.98,5217.52 U3.8@5296.46,5225 5425,5225 5545,5345 5545,5483.98 R16.2@5596.02,5535 ; R119.1@5274.46,5118.45 ccw(c5239.42,5153.49) 5288.98,5153.49 ; R119.1@5274.46,5118.45 ccw(c5239.42,5153.49) 5288.98,5153.49 ; R119.1@5274.46,5118.45 ccw(c5239.42,5153.49) 5288.98,5153.49 ; 5288.98,5153.49 ccw(c5338.53,5153.49) R119.1@5303.49,5118.45 ; 5288.98,5153.49 ccw(c5338.53,5153.49) R119.1@5303.49,5118.45 ; 5288.98,5153.49 ccw(c5338.53,5153.49) R119.1@5303.49,5118.45 ; 5288.98,5195.4 cw(c5326.05,5195.4) U3.8@5299.84,5221.62 ; 5288.98,5195.4 cw(c5326.05,5195.4) U3.8@5299.84,5221.62 ; 5288.98,5195.4 cw(c5326.05,5195.4) U3.8@5299.84,5221.62 ; 5291.57,5207.31 ccw(c5277.1,5215.66) U3.8@5292.15,5222.92 ; 5291.57,5207.31 ccw(c5277.1,5215.66) U3.8@5292.15,5222.92 ; 5291.57,5207.31 ccw(c5277.1,5215.66) U3.8@5292.15,5222.92 ; 5554.26,5493.24 cw(c5596.02,5451.47) R16.2@5596.02,5510.54 ; 5554.26,5493.24 cw(c5596.02,5451.47) R16.2@5596.02,5510.54 ; 5554.26,5493.24 cw(c5596.02,5451.47) R16.2@5596.02,5510.54 ; 5563.58,5501.84 ccw(c5552.58,5542.89) R16.2@5593.59,5531.73 ; 5563.58,5501.84 ccw(c5552.58,5542.89) R16.2@5593.59,5531.73 ; 5563.58,5501.84 ccw(c5552.58,5542.89) R16.2@5593.59,5531.73 ; 5563.77,5502.74 ccw(c5535.44,5531.06) R16.2@5575.5,5531.06 ; 5563.77,5502.74 ccw(c5535.44,5531.06) R16.2@5575.5,5531.06 ; 5563.77,5502.74 ccw(c5535.44,5531.06) R16.2@5575.5,5531.06
NetR21_1: R21.1 R107.1 U3.10 | length 1351.5
  Top Layer w18: U3.10@5296.46,5325 5365,5325 5415,5375 5415,5630 ; R107.1@5413.98,5700 5415,5698.98 5415,5630 ; R21.1@5678.98,5685 5623.98,5630 5415,5630 ; R107.1@5399.46,5681.55 cw(c5361.95,5644.03) 5415,5644.03 ; R107.1@5399.46,5681.55 cw(c5361.95,5644.03) 5415,5644.03 ; R107.1@5399.46,5681.55 cw(c5361.95,5644.03) 5415,5644.03 ; 5415,5648.98 cw(c5461.06,5648.98) R107.1@5428.49,5681.55 ; 5415,5648.98 cw(c5461.06,5648.98) R107.1@5428.49,5681.55 ; 5415,5648.98 cw(c5461.06,5648.98) R107.1@5428.49,5681.55 ; 5637.21,5643.24 cw(c5678.98,5601.47) R21.1@5678.98,5660.54 ; 5637.21,5643.24 cw(c5678.98,5601.47) R21.1@5678.98,5660.54 ; 5637.21,5643.24 cw(c5678.98,5601.47) R21.1@5678.98,5660.54 ; 5646.53,5651.84 ccw(c5635.53,5692.89) R21.1@5676.54,5681.73 ; 5646.53,5651.84 ccw(c5635.53,5692.89) R21.1@5676.54,5681.73 ; 5646.53,5651.84 ccw(c5635.53,5692.89) R21.1@5676.54,5681.73 ; 5646.72,5652.74 ccw(c5618.4,5681.06) R21.1@5658.45,5681.06 ; 5646.72,5652.74 ccw(c5618.4,5681.06) R21.1@5658.45,5681.06 ; 5646.72,5652.74 ccw(c5618.4,5681.06) R21.1@5658.45,5681.06
NetR24_2: R24.2 U3.3 | length 344.8
  Top Layer w18: R24.2@4931.02,5455 4936.02,5460 4975,5460 ; U3.3@5103.54,5425 5010,5425 4975,5460 ; R24.2@4952.43,5471.27 ccw(c4975,5488.22) 4975,5460 ; R24.2@4952.43,5471.27 ccw(c4975,5488.22) 4975,5460 ; R24.2@4952.43,5471.27 ccw(c4975,5488.22) 4975,5460 ; R24.2@4953.43,5448.05 cw(c4975,5434.55) 4975,5460 ; R24.2@4953.43,5448.05 cw(c4975,5434.55) 4975,5460 ; R24.2@4953.43,5448.05 cw(c4975,5434.55) 4975,5460
NetR26_2: R26.2 U1.1 | length 1715.5
  Top Layer w18: R26.2@4483.98,4380 4483.98,4393.98 4590,4500 4745,4500 4840,4595 4840,4670 ; U1.1@4750,4710 4800,4710 ; R26.2@4483.1,4386.31 ccw(c4465.75,4433.47) 4514.29,4420.46 ; R26.2@4483.1,4386.31 ccw(c4465.75,4433.47) 4514.29,4420.46 ; R26.2@4483.1,4386.31 ccw(c4465.75,4433.47) 4514.29,4420.46 ; R26.2@4483.98,4404.46 ccw(c4483.98,4429.79) R26.2@4501.88,4411.88 ; R26.2@4483.98,4404.46 ccw(c4483.98,4429.79) R26.2@4501.88,4411.88 ; R26.2@4483.98,4404.46 ccw(c4483.98,4429.79) R26.2@4501.88,4411.88 ; R26.2@4504.5,4383.94 cw(c4578.3,4383.94) 4526.12,4436.12 ; R26.2@4504.5,4383.94 cw(c4578.3,4383.94) 4526.12,4436.12 ; R26.2@4504.5,4383.94 cw(c4578.3,4383.94) 4526.12,4436.12 ; U1.1@4754.56,4716.9 cw(c4771.61,4676.93) 4802.34,4707.66 ; U1.1@4754.56,4716.9 cw(c4771.61,4676.93) 4802.34,4707.66 ; U1.1@4754.56,4716.9 cw(c4771.61,4676.93) 4802.34,4707.66 ; U1.1@4761.62,4700.34 cw(c4782.88,4650.54) 4821.17,4688.83 ; U1.1@4761.62,4700.34 cw(c4782.88,4650.54) 4821.17,4688.83 ; U1.1@4761.62,4700.34 cw(c4782.88,4650.54) 4821.17,4688.83 ; U1.1@4768.69,4683.79 cw(c4794.15,4624.15) 4840,4670 ; U1.1@4768.69,4683.79 cw(c4794.15,4624.15) 4840,4670 ; U1.1@4768.69,4683.79 cw(c4794.15,4624.15) 4840,4670 ; U1.1@4783.87,4699.18 cw(c4800,4692.56) 4800,4710 ; U1.1@4783.87,4699.18 cw(c4800,4692.56) 4800,4710 ; U1.1@4783.87,4699.18 cw(c4800,4692.56) 4800,4710 ; U1.1@4783.87,4720.82 ccw(c4800,4727.44) 4800,4710 ; U1.1@4783.87,4720.82 ccw(c4800,4727.44) 4800,4710 ; U1.1@4783.87,4720.82 ccw(c4800,4727.44) 4800,4710 ; 4800,4710 4840,4670
NetR27_1: R27.1 R28.2 R33.1 U1.3 | length 1687
  Top Layer w18: R28.2@4483.98,4585 4483.98,4587.95 R27.1@4606.02,4710 4606.02,4751.02 ; 4564.26,4668.24 cw(c4606.02,4626.47) R27.1@4606.02,4685.54 ; 4573.77,4677.74 ccw(c4545.44,4706.06) R27.1@4585.5,4706.06 ; R27.1@4591.19,4709.53 cw(c4625.71,4719.79) 4600.25,4745.25 ; R27.1@4591.51,4728.45 ccw(c4556.47,4763.49) 4606.02,4763.49 ccw(c4655.58,4763.49) R27.1@4620.54,4728.45 ; R33.1@4591.51,4806.55 cw(c4556.46,4771.5) 4606.02,4771.5 cw(c4655.58,4771.51) R33.1@4620.54,4806.55 ; R27.1@4608.45,4714.66 cw(c4658.67,4729.58) 4621.62,4766.62 ; R33.1@4611.02,4825 4606.02,4820 4606.02,4751.02 ; R27.1@4625.7,4719.78 cw(c4691.63,4739.37) 4643,4788 ; U1.3@5022.35,4589.85 ccw(c4973.69,4541.19) 4973.69,4610 ccw(c4973.69,4678.81) U1.3@5022.35,4630.15 ; U1.3@5050,4610 4950,4610 4906,4654 4906,4694 4812,4788 4643,4788 ; R28.2@4483.98,4609.46 ccw(c4483.98,4661.4) 4520.7,4624.68 ; R28.2@4483.98,4609.46 ccw(c4483.98,4661.4) 4520.7,4624.68 ; R28.2@4483.98,4609.46 ccw(c4483.98,4661.4) 4520.7,4624.68 ; R28.2@4504.5,4588.94 cw(c4551.68,4588.94) 4518.32,4622.3 ; R28.2@4504.5,4588.94 cw(c4551.68,4588.94) 4518.32,4622.3 ; R28.2@4504.5,4588.94 cw(c4551.68,4588.94) 4518.32,4622.3 ; 4606.02,4751.02 cw(c4582.79,4751.02) 4595.13,4731.33 ccw(c4582.79,4751.02) 4606.02,4751.02 ; 4606.02,4751.02 ccw(c4629.26,4751.02) 4616.92,4731.33 cw(c4629.26,4751.02) 4606.02,4751.02 ; 4606.02,4751.02 4643,4788
NetR29_2: R29.2 U4.1 | length 888.6
  Top Layer w18: U4.1@5245,4710 5205,4710 5175,4680 ; R29.2@5306.02,4380 5306.02,4423.98 5175,4555 5175,4680 ; 5175,4680 cw(c5202.43,4652.57) U4.1@5222.65,4685.68 ; 5175,4680 cw(c5202.43,4652.57) U4.1@5222.65,4685.68 ; 5175,4680 cw(c5202.43,4652.57) U4.1@5222.65,4685.68 ; 5191.17,4696.17 cw(c5214.69,4672.65) U4.1@5232.03,4701.04 ; 5191.17,4696.17 cw(c5214.69,4672.65) U4.1@5232.03,4701.04 ; 5191.17,4696.17 cw(c5214.69,4672.65) U4.1@5232.03,4701.04 ; R29.2@5294.04,4400.6 ccw(c5277.24,4423.97) 5306.02,4423.97 ; R29.2@5294.04,4400.6 ccw(c5277.24,4423.97) 5306.02,4423.97 ; R29.2@5294.04,4400.6 ccw(c5277.24,4423.97) 5306.02,4423.97 ; 5306.02,4423.97 ccw(c5334.81,4423.97) R29.2@5318.01,4400.6 ; 5306.02,4423.97 ccw(c5334.81,4423.97) R29.2@5318.01,4400.6 ; 5306.02,4423.97 ccw(c5334.81,4423.97) R29.2@5318.01,4400.6
NetR62_2: R62.2 R64.2 U3.5 | length 1503.1
  Top Layer w18: R62.2@4686.02,5105 4686.02,5151.02 ; U3.5@5103.54,5325 5165,5325 5190,5300 5190,5160 5125,5095 4946.02,5095 R64.2@4936.02,5105 4936.02,5153.98 4910,5180 4715,5180 4686.02,5151.02 ; R62.2@4673.39,5125.11 ccw(c4653.15,5151.02) 4686.02,5151.02 ; R62.2@4673.39,5125.11 ccw(c4653.15,5151.02) 4686.02,5151.02 ; R62.2@4673.39,5125.11 ccw(c4653.15,5151.02) 4686.02,5151.02 ; 4686.02,5151.02 ccw(c4718.9,5151.02) R62.2@4698.66,5125.11 ; 4686.02,5151.02 ccw(c4718.9,5151.02) R62.2@4698.66,5125.11 ; 4686.02,5151.02 ccw(c4718.9,5151.02) R62.2@4698.66,5125.11 ; R64.2@4922.56,5124.43 ccw(c4896.88,5153.97) 4936.02,5153.97 ; R64.2@4922.56,5124.43 ccw(c4896.88,5153.97) 4936.02,5153.97 ; R64.2@4922.56,5124.43 ccw(c4896.88,5153.97) 4936.02,5153.97 ; 4936.02,5153.97 ccw(c4975.17,5153.97) R64.2@4949.49,5124.43 ; 4936.02,5153.97 ccw(c4975.17,5153.97) R64.2@4949.49,5124.43 ; 4936.02,5153.97 ccw(c4975.17,5153.97) R64.2@4949.49,5124.43 ; R64.2@4950.54,5086.55 cw(c4970.94,5066.14) 4970.94,5095 ; R64.2@4950.54,5086.55 cw(c4970.94,5066.14) 4970.94,5095 ; R64.2@4950.54,5086.55 cw(c4970.94,5066.14) 4970.94,5095 ; R64.2@4950.54,5115.58 ccw(c5000.22,5165.26) 5000.22,5095 ; R64.2@4950.54,5115.58 ccw(c5000.22,5165.26) 5000.22,5095 ; R64.2@4950.54,5115.58 ccw(c5000.22,5165.26) 5000.22,5095
NetU9_1: U9.1 Y2.1 | length 423.5
  Bottom Layer w24: Y2.1@5993.63,4534.01 cw(c6062.02,4474.03) 6062.02,4565 ; Y2.1@5995,4535 6025,4565 U9.1@6115,4565 ccw(c6114.99,4427.57) Y2.1@6011.67,4518.19 ; U9.1@6089.47,4546.97 ccw(c6045.94,4503.44) 6045.94,4565 ccw(c6045.94,4626.56) U9.1@6089.47,4583.03
NetU9_2: U9.2 Y2.2 | length 400.7
  Bottom Layer w24: Y2.2@5993.25,4436.3 ccw(c6013.78,4471.94) 6042.86,4442.86 ; Y2.2@5995,4435 6035,4435 ; Y2.2@6005.23,4457.1 ccw(c6029.96,4500.04) 6065,4465 ; Y2.2@6015,4447 ccw(c6035,4457.66) 6035,4435 ; 6057.14,4457.14 cw(c6086.22,4428.06) U9.2@6106.75,4463.7 ; U9.2@6085,4453 ccw(c6065,4442.34) 6065,4465 ; U9.2@6085,4477 cw(c6065,4487.66) 6065,4465 ; U9.2@6094.77,4442.9 ccw(c6070.04,4399.96) 6035,4435 ; U9.2@6115,4465 6065,4465
PREHEATER: "P2 RELAYS.2" MC1.19 | length 1618.8
  Bottom Layer w20: 6747.24,4153.54 6751,4157.3 6751,4328 6853,4430 6853,4541 ; MC1.19@6760,4580 6814,4580 ; 6727.8,4182.99 ccw(c6671.79,4239) 6751,4239 ; 6727.8,4182.99 ccw(c6671.79,4239) 6751,4239 ; 6727.8,4182.99 ccw(c6671.79,4239) 6751,4239 ; 6751,4220.87 ccw(c6804.57,4220.87) 6766.69,4182.99 ; 6751,4220.87 ccw(c6804.57,4220.87) 6766.69,4182.99 ; 6751,4220.87 ccw(c6804.57,4220.87) 6766.69,4182.99 ; MC1.19@6762.44,4591.43 cw(c6780.4,4550.88) 6811.76,4582.24 ; MC1.19@6762.44,4591.43 cw(c6780.4,4550.88) 6811.76,4582.24 ; MC1.19@6762.44,4591.43 cw(c6780.4,4550.88) 6811.76,4582.24 ; MC1.19@6770.54,4573.14 cw(c6793.06,4522.3) 6832.38,4561.62 ; MC1.19@6770.54,4573.14 cw(c6793.06,4522.3) 6832.38,4561.62 ; MC1.19@6770.54,4573.14 cw(c6793.06,4522.3) 6832.38,4561.62 ; MC1.19@6778.64,4554.86 cw(c6805.72,4493.72) 6853,4541 ; MC1.19@6778.64,4554.86 cw(c6805.72,4493.72) 6853,4541 ; MC1.19@6778.64,4554.86 cw(c6805.72,4493.72) 6853,4541 ; MC1.19@6791.6,4566.75 cw(c6814,4554.44) 6814,4580 ; MC1.19@6791.6,4566.75 cw(c6814,4554.44) 6814,4580 ; MC1.19@6791.6,4566.75 cw(c6814,4554.44) 6814,4580 ; MC1.19@6791.6,4593.25 ccw(c6814,4605.56) 6814,4580 ; MC1.19@6791.6,4593.25 ccw(c6814,4605.56) 6814,4580 ; MC1.19@6791.6,4593.25 ccw(c6814,4605.56) 6814,4580 ; 6814,4580 6853,4541
R1IN: D4.2 P1PANEL.12 R29.1 | length 5734.8
  Top Layer w30: v1(5165,4470) 5183.98,4451.02 R29.1@5183.98,4380 ; v1@5154.39,4459.39 cw(c5082.97,4387.97) R29.1@5183.98,4387.97 ; v1@5154.39,4459.39 cw(c5082.97,4387.97) R29.1@5183.98,4387.97 ; v1@5154.39,4459.39 cw(c5082.97,4387.97) R29.1@5183.98,4387.97 ; R29.1@5171.39,4391.2 ccw(c5137.93,4410.52) 5175.26,4420.52 ; R29.1@5171.39,4391.2 ccw(c5137.93,4410.52) 5175.26,4420.52 ; R29.1@5171.39,4391.2 ccw(c5137.93,4410.52) 5175.26,4420.52 ; R29.1@5173.7,4394.21 ccw(c5148.9,4419.01) 5183.98,4419.01 ; R29.1@5173.7,4394.21 ccw(c5148.9,4419.01) 5183.98,4419.01 ; R29.1@5173.7,4394.21 ccw(c5148.9,4419.01) 5183.98,4419.01 ; 5176.35,4421.36 cw(c5209.68,4440.6) v1@5177.53,4461.75 ; 5176.35,4421.36 cw(c5209.68,4440.6) v1@5177.53,4461.75 ; 5176.35,4421.36 cw(c5209.68,4440.6) v1@5177.53,4461.75 ; 5176.56,4415.65 ccw(c5206.99,4423.8) R29.1@5191.24,4396.52 ; 5176.56,4415.65 ccw(c5206.99,4423.8) R29.1@5191.24,4396.52 ; 5176.56,4415.65 ccw(c5206.99,4423.8) R29.1@5191.24,4396.52 ; 5183.98,4419.01 ccw(c5219.05,4419.01) R29.1@5194.25,4394.21 ; 5183.98,4419.01 ccw(c5219.05,4419.01) R29.1@5194.25,4394.21 ; 5183.98,4419.01 ccw(c5219.05,4419.01) R29.1@5194.25,4394.21
  Bottom Layer w30: P1PANEL.12@4153.54,5266.14 4096.14,5266.14 ; v1(5165,4470) 5155,4480 D4.2@4175,4480 ; 4035,5205 cw(c4129.75,5110.25) P1PANEL.12@4141.56,5243.73 ; 4035,5205 cw(c4129.75,5110.25) P1PANEL.12@4141.56,5243.73 ; 4035,5205 cw(c4129.75,5110.25) P1PANEL.12@4141.56,5243.73 ; 4035,5205 4096.14,5266.14 ; 4035,5205 4035,4540 4095,4480 ; 4080.44,5250.44 cw(c4137.14,5193.74) P1PANEL.12@4144.2,5273.61 ; 4080.44,5250.44 cw(c4137.14,5193.74) P1PANEL.12@4144.2,5273.61 ; 4080.44,5250.44 cw(c4137.14,5193.74) P1PANEL.12@4144.2,5273.61 ; 4095,4480 ccw(c4095,4531.73) D4.2@4145.64,4521.14 ; 4095,4480 ccw(c4095,4531.73) D4.2@4145.64,4521.14 ; 4095,4480 ccw(c4095,4531.73) D4.2@4145.64,4521.14 ; 4095,4480 D4.2@4175,4480 ; 4096.14,5266.14 cw(c4096.14,5227.46) P1PANEL.12@4126.11,5251.92 ; 4096.14,5266.14 ccw(c4096.14,5304.82) P1PANEL.12@4126.11,5280.37 ; 4096.14,5266.14 ccw(c4096.14,5304.82) P1PANEL.12@4126.11,5280.37 ; 4096.14,5266.14 cw(c4096.14,5227.46) P1PANEL.12@4126.11,5251.92 ; 4096.14,5266.14 ccw(c4096.14,5304.82) P1PANEL.12@4126.11,5280.37 ; 4096.14,5266.14 cw(c4096.14,5227.46) P1PANEL.12@4126.11,5251.92 ; 4113.45,5238.8 ccw(c4103.76,5294.05) P1PANEL.12@4149.68,5261.83 ; 4113.45,5238.8 ccw(c4103.76,5294.05) P1PANEL.12@4149.68,5261.83 ; 4113.45,5238.8 ccw(c4103.76,5294.05) P1PANEL.12@4149.68,5261.83 ; 4131.92,4480 ccw(c4131.92,4524.01) D4.2@4175,4515 ; 4131.92,4480 ccw(c4131.92,4524.01) D4.2@4175,4515 ; 4131.92,4480 ccw(c4131.92,4524.01) D4.2@4175,4515 ; D4.2@4175,4480 D4.2@4175,4515 ; D4.2@4175,4515 cw(c4203.69,4475.88) 4227.95,4517.89 ; D4.2@4175,4515 cw(c4203.69,4475.88) 4227.95,4517.89 ; D4.2@4175,4515 ccw(c4259.5,4599.5) 4259.5,4480 ; D4.2@4175,4515 ccw(c4259.5,4599.5) 4259.5,4480 ; D4.2@4175,4515 ccw(c4259.5,4599.5) 4259.5,4480 ; D4.2@4175,4515 cw(c4203.69,4475.88) 4227.95,4517.89 ; D4.2@4186.12,4487.14 cw(c4204.18,4441.84) 4228.57,4484.07 ; D4.2@4186.12,4487.14 cw(c4204.18,4441.84) 4228.57,4484.07 ; D4.2@4186.12,4487.14 cw(c4204.18,4441.84) 4228.57,4484.07 ; D4.2@4192.74,4490.81 cw(c4233.39,4435.38) 4267.76,4494.91 ; D4.2@4192.74,4490.81 cw(c4233.39,4435.38) 4267.76,4494.91 ; D4.2@4192.74,4490.81 cw(c4233.39,4435.38) 4267.76,4494.91 ; D4.2@4196.21,4536.21 ccw(c4331.92,4671.92) 4331.92,4480 ; D4.2@4196.21,4536.21 ccw(c4331.92,4671.92) 4331.92,4480 ; D4.2@4196.21,4536.21 ccw(c4331.92,4671.92) 4331.92,4480 ; D4.2@4204.69,4519.31 ccw(c4252.95,4526.31) 4228.57,4484.07 ; D4.2@4204.69,4519.31 ccw(c4252.95,4526.31) 4228.57,4484.07 ; D4.2@4204.69,4519.31 ccw(c4252.95,4526.31) 4228.57,4484.07 ; 5104.64,4480 cw(c5104.64,4409.64) v1@5154.39,4459.39 ; 5104.64,4480 cw(c5104.64,4409.64) v1@5154.39,4459.39 ; 5104.64,4480 cw(c5104.64,4409.64) v1@5154.39,4459.39 ; 5130.1,4473.42 ccw(c5138.62,4488.17) v1@5152.65,4478.51 ; 5130.1,4473.42 ccw(c5138.62,4488.17) v1@5152.65,4478.51 ; 5130.1,4473.42 ccw(c5138.62,4488.17) v1@5152.65,4478.51